# Altium PCB OBCComms.PcbDoc
Units mil, origin at the board's own origin, x right, y up, seen from the top; angles counter-clockwise.
Board outline 3625 x 3400 mil, 2 copper layers (Component Side, Bottom Layer), stack 65.756 mil thick; 25 components, 29 nets, 206 pads, 43 vias.
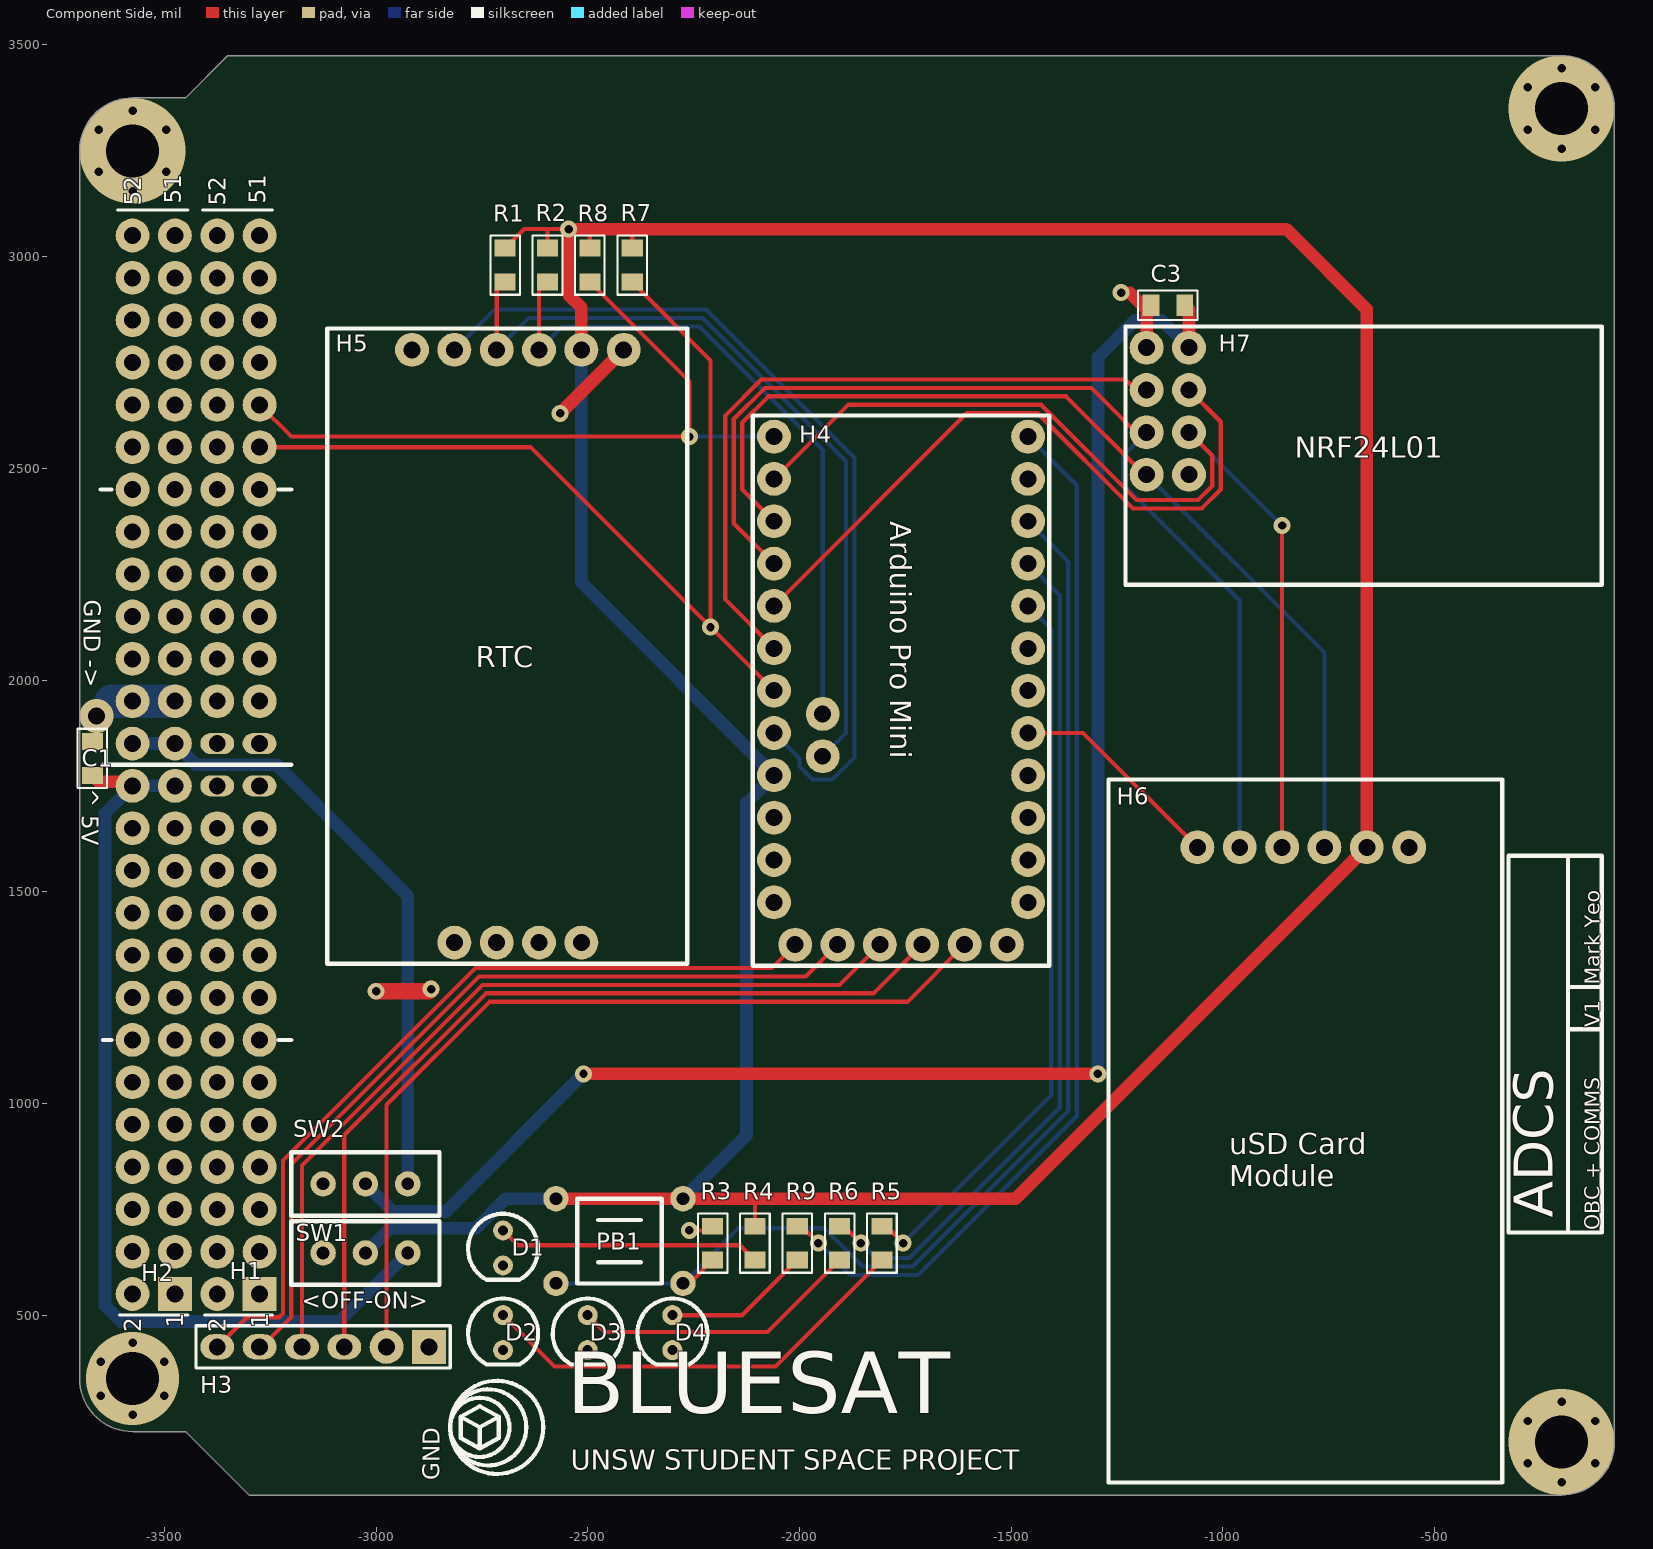
[diagram p0: Component Side view]
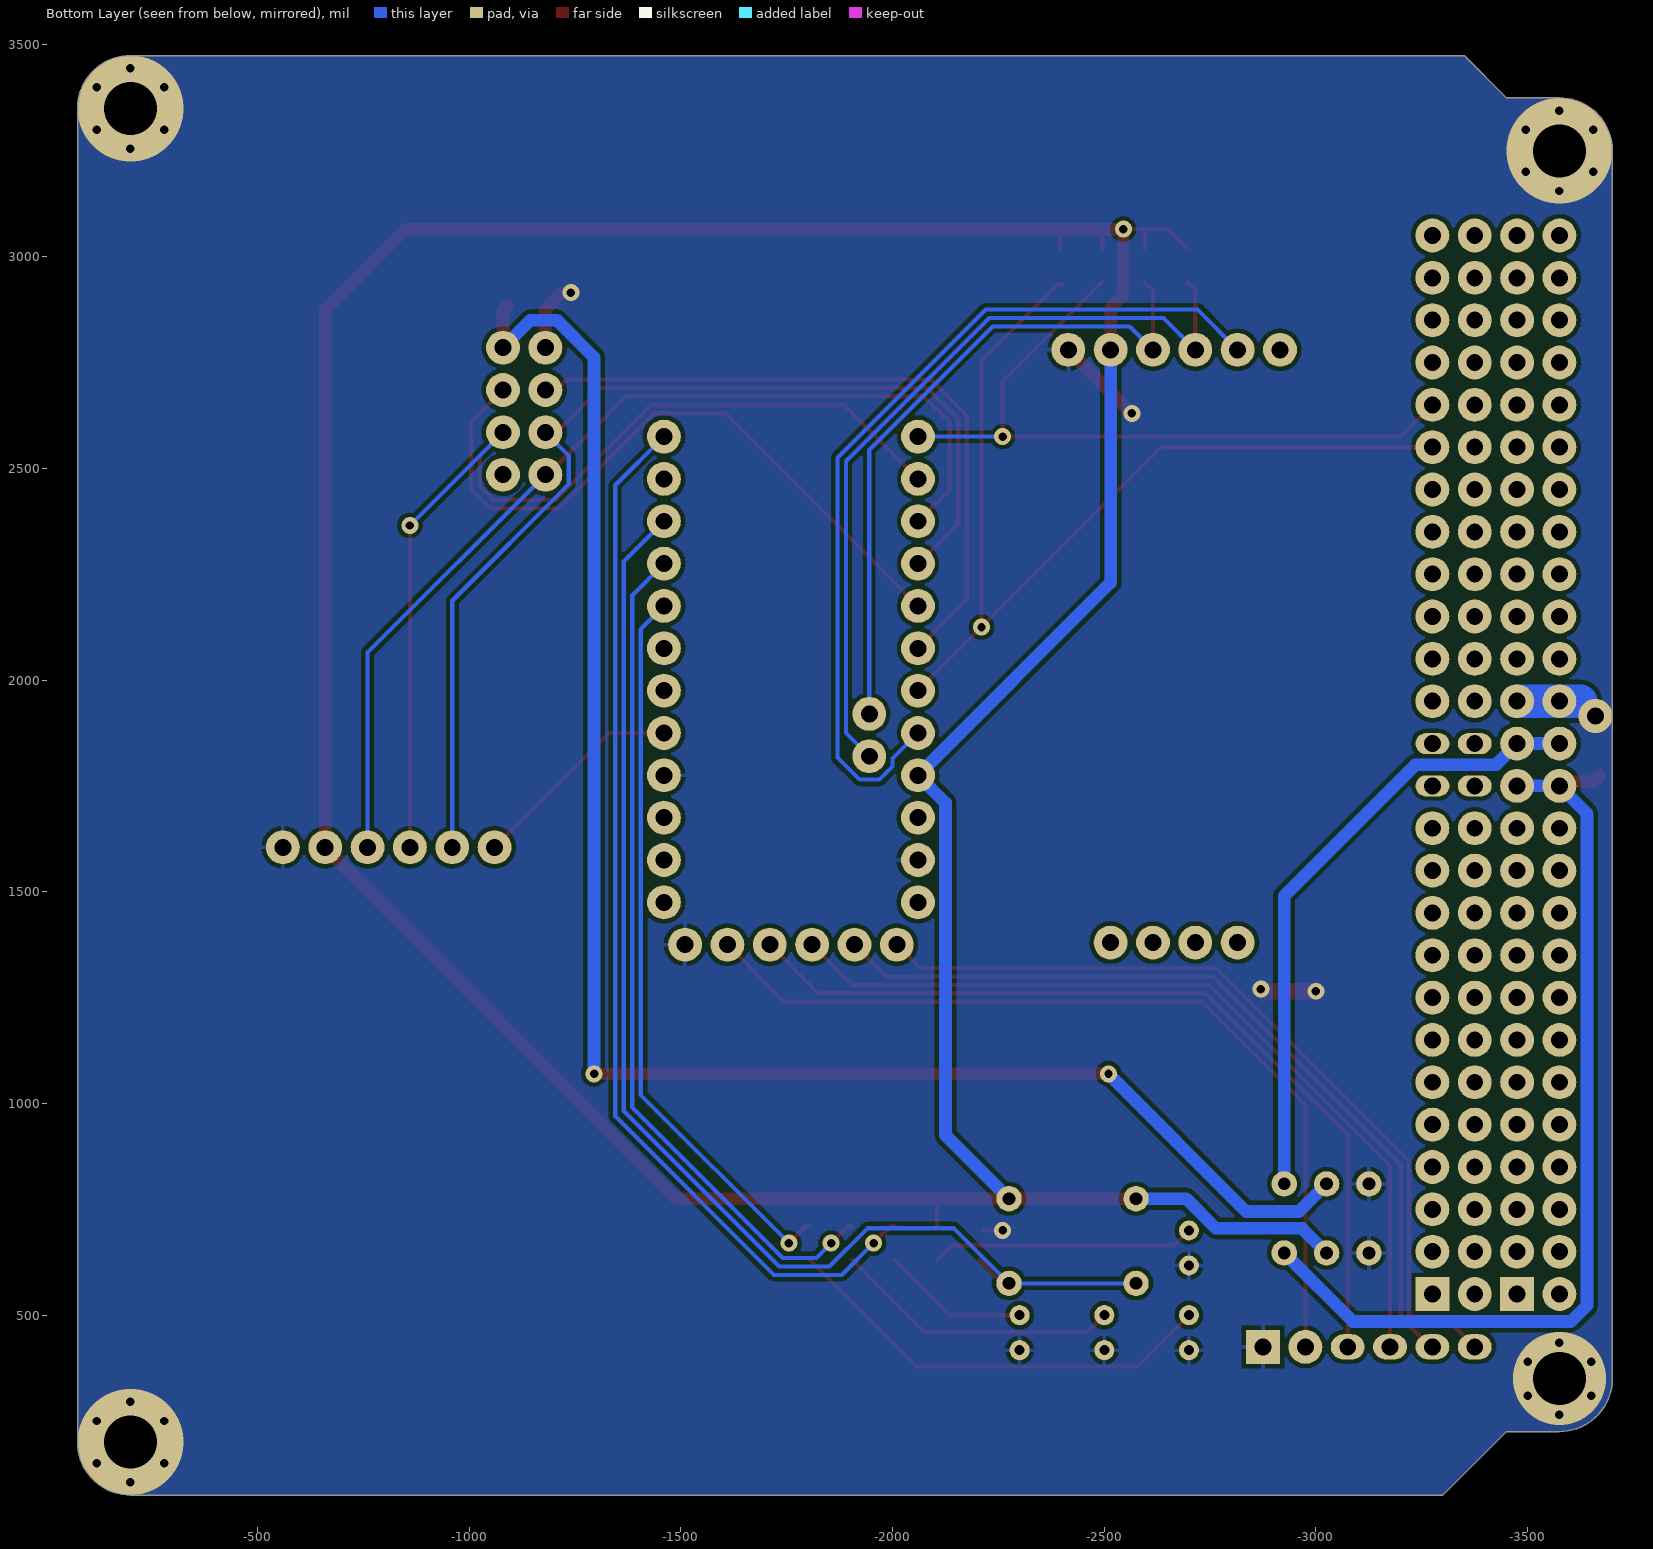
[diagram p1: Bottom Layer view, seen from below]

## Layer stack, top to bottom
Top Solder: solder mask 0.394, Solder Resist, Dk 3.5
Component Side: signal copper 1.378
Dielectric 1: core 63, FR-4, Dk 4.2
Bottom Layer: signal copper 1.378
Solder Side: solder mask 0.394, Solder Resist, Dk 3.5

## Board outline
-3575,225 cw(c-3575,350) -3700,350 -3700,3250 cw(c-3575,3250) -3575,3375 -3450,3375 -3350,3475 -200,3475 cw(c-200,3350) -75,3350 -75,200 cw(c-200,200) -200,75 -3300,75 -3450,225

## Design rules (kind name [scope] priority, off if disabled: settings)
Clearance [All] p1: gap=10
Clearance "Clearance (Same Net)" [All] p2: gap=0 except(8: SMDPad-SMDPad SMDPad-THPad SMDPad-Via)
ComponentClearance [All] p1: gap=0 collisioncheckmode=3 verticalgap=0 showdistances=FALSE
HoleSize HoleSize_1 [All] p1: absolutevalues=TRUE maxlimit=100000 minlimit=24 maxpercent=80.000 minpercent=20.000
HoleSize [All] p2: absolutevalues=TRUE maxlimit=100 minlimit=1 maxpercent=80.000 minpercent=20.000
HoleToHoleClearance mdViaViaSameLayer [All] p1: gap=8 allowstackedmicrovias=TRUE
HoleToHoleClearance [All] p2: gap=10 allowstackedmicrovias=TRUE
PasteMaskExpansion mlMinCreamFrame [All] p1: expansion=0
PasteMaskExpansion [All] p2: expansion=0
PlaneConnect PlaneConnect_1 [All] p1: planeconnectstyle=Relief reliefexpansion=20 reliefentries=4 reliefconductorwidth=10 reliefairgap=10
PlaneConnect PlaneConnect_2 [IsVia AND InNet('GND')] p2: planeconnectstyle=Direct reliefexpansion=20 reliefentries=4 reliefconductorwidth=10 reliefairgap=10
PolygonConnect ThermalVias [IsVia] p1: connectstyle=Direct reliefconductorwidth=10 reliefentries=4 polygonreliefangle="90 Angle" airgapwidth=10
PolygonConnect [All] p2: connectstyle=Relief reliefconductorwidth=10 reliefentries=4 polygonreliefangle="90 Angle" airgapwidth=10
RoutingVias [All] p1: holewidth=28 width=50 viastyle="Through Hole" minholewidth=28 minwidth=50 maxholewidth=28 maxwidth=50
SilkToSilkClearance [All] p1 off: silktosilkclearance=10
SilkToSolderMaskClearance [IsPad] p1 off: minsilkscreentomaskgap=10 clearancetoexposedcopper=TRUE
SolderMaskExpansion mlMinStopFrame [All] p1: expansion=4
SolderMaskExpansion [All] p2: expansion=4
Width Width_1 [All] p1: maxlimit=100000 minlimit=6 preferedwidth=10
Width [All] p2: maxlimit=10 minlimit=8 preferedwidth=10
23 further rules are at their usual default settings.

## Components (designator, comment, footprint, x,y, rotation, side; value= is the part's Value field where it differs from the comment)
C1 "100nF" 0805C-TBD -3670,1785 r90 top
C3 "10uF" 0805C-GENERIC -1160,2885 r0 top
D1 "LED" LED -2700,700 r0 top
D2 "LED" LED -2700,500 r0 top
D3 "LED" LED -2500,500 r0 top
D4 "LED" LED -2300,500 r0 top
H1 "26X2 Header" "26X2 Header"#1 -3275,550 r90 top
H2 "26X2 Header" "26X2 Header"#2 -3475,550 r90 top
H3 "Header 6" HDR1X6 -2875,425 r180 top
H4 "Arduino Pro Mini" "Arduino Pro Mini" -1460,1475 r180 top
H5 "DS3231" RTC -2915,2780 r90 top
H6 "uSD Card Module" "uSD Card Module" -1060,1605 r90 top
H7 "NRF24L01" NRF24L01 -1180,2785 r0 top
PB1 "PushButton" PushButton -2575,575 r0 top
R1 "4K7" 0805R-4K7 -2695,3010 r270 top
R2 "4K7" 0805R-4K7 -2595,3010 r270 top
R3 "4K7" 0805R-4K7 -2205,640 r90 top
R4 "150R" 0805R-150 -2105,700 r270 top
R5 "150R" 0805R-150 -1805,700 r270 top
R6 "150R" 0805R-150 -1905,700 r270 top
R7 "4K7" 0805R-4K7 -2395,3010 r270 top
R8 "4K7" 0805R-4K7 -2495,3010 r270 top
R9 "150R" 0805R-150 -2005,700 r270 top
SW1 "ToggleSwitch" SWITCHFOOTPRINT -2925,647 r90 top
SW2 "ToggleSwitch" SWITCHFOOTPRINT -2925,810 r90 top

## Footprints (in the part's own frame and the unit in brackets; to place one, negate y for a bottom-side part, rotate by r counter-clockwise, add the part's x,y. Pads: shape width x height; smd on the part's side, far side on the other; paste and mask are expansions set on the pad)
"26X2 Header"#1 [mil]
  rect 80x80 hole 40: 1(0,0)
  round 80 hole 40: 2(0,100) 3(100,0) 4(100,100) 5(200,0) 6(200,100) 7(300,0) 8(300,100) 9(400,0) 10(400,100) 11(500,0) 12(500,100) 13(600,0) 14(600,100) 15(700,0) 16(700,100) 17(800,0) 18(800,100) 19(900,0) 20(900,100) 21(1000,0) 22(1000,100) 23(1100,0) 24(1100,100) 29(1400,0) 30(1400,100) 31(1500,0) 32(1500,100) 33(1600,0) 34(1600,100) 35(1700,0) 36(1700,100) 37(1800,0) 38(1800,100) 39(1900,0) 40(1900,100) 41(2000,0) 42(2000,100) 43(2100,0) 44(2100,100) 45(2200,0) 46(2200,100) 47(2300,0) 48(2300,100) 49(2400,0) 50(2400,100) 51(2500,0) 52(2500,100)
  oval 50x80 hole 40: 25(1200,0) 26(1200,100) 27(1300,0) 28(1300,100)
  silkscreen extent -50,-30 2560,135, body extent -55,-47 2555,150, height 335
"26X2 Header"#2 [mil]
  rect 80x80 hole 40: 1(0,0)
  round 80 hole 40: 2(0,100) 3(100,0) 4(100,100) 5(200,0) 6(200,100) 7(300,0) 8(300,100) 9(400,0) 10(400,100) 11(500,0) 12(500,100) 13(600,0) 14(600,100) 15(700,0) 16(700,100) 17(800,0) 18(800,100) 19(900,0) 20(900,100) 21(1000,0) 22(1000,100) 23(1100,0) 24(1100,100) 25(1200,0) 26(1200,100) 27(1300,0) 28(1300,100) 29(1400,0) 30(1400,100) 31(1500,0) 32(1500,100) 33(1600,0) 34(1600,100) 35(1700,0) 36(1700,100) 37(1800,0) 38(1800,100) 39(1900,0) 40(1900,100) 41(2000,0) 42(2000,100) 43(2100,0) 44(2100,100) 45(2200,0) 46(2200,100) 47(2300,0) 48(2300,100) 49(2400,0) 50(2400,100) 51(2500,0) 52(2500,100)
  silkscreen extent -50,-30 2560,135, body extent -55,-47 2555,150, height 335
0805C-GENERIC [mil] "CAPACITOR 0805"
  rect 40x50 smd: 1(-10,0) 2(70,0)
  silkscreen extent -40,-35 100,35, body extent -11,-25 70,25, height 26
0805C-TBD [mil] "CAPACITOR 0805"
  rect 40x50 smd: 1(-10,0) 2(70,0)
  silkscreen extent -40,-35 100,35, body extent -11,-25 70,25, height 26
0805R-4K7 [mil] "RESISTOR 0805"
  rect 40x50 smd: 1(-10,0) 2(70,0)
  silkscreen extent -40,-35 100,35, body extent -11,-25 70,25, height 27
0805R-150 [mil] "RESISTOR 0805"
  rect 40x50 smd: 1(-10,0) 2(70,0)
  silkscreen extent -40,-35 100,35, body extent -11,-25 70,25, height 27
"Arduino Pro Mini" [mil]
  round 80 hole 40: 1(0,0) 2(0,-100) 3(0,-200) 4(0,-300) 5(0,-400) 6(0,-500) 7(0,-600) 8(0,-700) 9(0,-800) 10(0,-900) 11(0,-1000) 12(0,-1100) 13(600,0) 14(600,-100) 15(600,-200) 16(600,-300) 17(600,-400) 18(600,-500) 19(600,-600) 20(600,-700) 21(600,-800) 22(600,-900) 23(600,-1000) 24(600,-1100) 25(485,-345) 26(485,-445) 27(50,100) 28(150,100) 29(250,100) 30(350,100) 31(450,100) 32(550,100)
  silkscreen extent -50,-1150 650,150
HDR1X6 [mil] "Connector; Header; 6 Position"
  rect 80x80 hole 40: 1(0,0)
  round 80 hole 40: 2(100,0)
  oval 80x60 hole 40: 3(200,0) 4(300,0) 5(400,0) 6(500,0)
  silkscreen extent -50,-50 550,50
LED [mm]
  round 1.2 hole 0.6: 1(0,0) 2(0,-2.1)
  silkscreen extent -2.1,-2.96 2.1,1
NRF24L01 [mil]
  round 80 hole 40: 1(0,0) 2(0,-100) 3(0,-200) 4(0,-300) 5(100,-300) 6(100,-200) 7(100,-100) 8(100,0)
  silkscreen extent -50,-560 1075,50
PushButton [mil]
  round 60 hole 30: 5(0,0) 6(300,0) 7(0,200) 8(300,200)
  silkscreen extent 50,0 250,200, body extent 50,0 250,200, height 300
RTC [mil]
  round 80 hole 40: 1(0,0) 2(0,-100) 3(0,-200) 4(0,-300) 5(0,-400) 6(0,-500) 7(-1400,-100) 8(-1400,-200) 9(-1400,-300) 10(-1400,-400)
  silkscreen extent -1450,-650 50,200
SWITCHFOOTPRINT [mil]
  round 60 hole 30: 2(0,0) 3(0,100) 4(0,200)
  silkscreen extent -75,-75 75,275, body extent -75,-75 75,275, height 300
"uSD Card Module" [mil]
  round 80 hole 40: 1(0,0) 2(0,-100) 3(0,-200) 4(0,-300) 5(0,-400) 6(0,-500)
  silkscreen extent -1500,-720 160,210

## Part data
C1: library part 0805C-100nF-25V-X7R-MUR, "CAPACITOR 0805 CERAMIC"
C3: library part 0805C-10UF-16V-X5R-TDK, "CAPACITOR 0805 CERAMIC"
D1 D2 D3 D4: "Small LED"
H3: "Header, 6-Pin"
H5: "RTC"
H7: "Radio Transceiver"
R1 R2 R3 R7 R8: library part 0805R-4K7, "RESISTOR 0805 1/4 WATT THIN FILM"
R4 R5 R6 R9: library part 0805R-150, "RESISTOR 0805 1/4 WATT THIN FILM"

## Via types
v1: diameter 40, hole 20, Component Side to Bottom Layer, 38 vias
v2: diameter 250, hole 125, Component Side to Bottom Layer, 3 vias
v3: diameter 220, hole 125, Component Side to Bottom Layer, 1 vias
v4: diameter 80, hole 40, Component Side to Bottom Layer, 1 vias

## Nets (pads, with @x,y where several pads share a name; then routed paths per layer and width w, separated by ;. In a path a pad name is that pad's centre, name@x,y a point inside that pad or via, vN(x,y) a via of type N, cw(c..) or ccw(c..) an arc to the next point about the centre after c; other vN are vias at no path point)
3V3: C3.2 H7.8 SW2.3 | length 3966
  Component Side w30: v1(-2510,1070) v1(-1295,1070) ; C3.2 -1080,2875 H7.8
  Bottom Layer w30: SW2.3 -2960,745 -2835,745 v1(-2510,1070) ; v1(-1295,1070) -1295,2761.92 -1206.92,2850 -1145,2850 H7.8
3V3_IN: H2.27 H2.28 SW2.2 | length 1479.1
  Bottom Layer w30: H2.28 H2.27 -3425,1800 -3235,1800 -2925,1490 SW2.2
5V_IN: C1.1 H2.25 H2.26 SW1.2 | length 2242.9
  Component Side w30: C1.1 -3655,1760 H2.26@-3585,1760
  Bottom Layer w30: H2.25 H2.26 -3640,1685 -3640,523.08 -3601.92,485 -3087,485 SW1.2
CE_NRF: H4.19 H7.2 | length 1620.3
  Component Side w10: H4.19 -2175,2190 -2175,2625 -2090,2710 -1230,2710 H7.2@-1200,2680
CS_NRF: H4.20 H7.7 | length 1621.4
  Component Side w10: H4.20 -1605,2630 -1437.22,2630 -1212.22,2405 -1050,2405 -1005,2450 -1005,2610 H7.7
CSUSD: H4.5 H6.1 | length 511.8
  Component Side w10: H4.5 -1330,1875 H6.1
EXTCLK: H4.17 H5.2 | length 2124.4
  Bottom Layer w10: H5.2 -2720,2875 -2220,2875 -1870,2525 -1870,1817.22 -1922.22,1765 -1969,1765 -2000,1796 -2000,1815 H4.17 H4.17@-2060,1856
GND: C1.2 C3.1 D1.2 D2.2 D3.2 D4.2 H2.29 H2.30 H3.1 H4.4 H4.14 H4.27 H5.6 H6.6 H7.1 R3.2 SW1.4 SW2.4 | length 705.8
  Component Side w10: v1(-2260,700) R3.2@-2215,700
  Component Side w30: v1(-2565,2630) H5.6 ; v1(-1240,2915) -1220,2915 -1180,2875 H7.1
  Component Side w40: v1(-3000,1265) -2875,1265 v1(-2870,1270)
  Bottom Layer w80: -3625,1950 H2.30 H2.29
  other v1: -200,105 -280,150 -120,150 -280,250 -120,250 -3575,265 -200,295 -3650,310 -3500,310 -3650,390 -3500,390 -3575,435 -3575,3155 -3655,3200 -3495,3200 -200,3255 -3655,3300 -3495,3300 -280,3300 -120,3300 -3575,3345 -280,3400 -120,3400 -200,3445
  other v2: -200,200 -3575,3250 -200,3350
  other v3: -3575,350
  other v4: -3660,1915
LED_B: H4.12 R9.1 | length 2515.6
  Component Side w10: R9.1 -1995,710 v1(-1955,670)
  Bottom Layer w10: v1(-1955,670) -1880,595 -1720,595 -1345,970 -1345,2460 H4.12
LED_G: H4.9 R6.1 | length 2013.9
  Component Side w10: R6.1 -1895,710 v1(-1855,670)
  Bottom Layer w10: v1(-1855,670) -1820,635 -1740.5,635 -1385,990.5 -1385,2200 H4.9
LED_Y: H4.8 R5.1 | length 1739.3
  Component Side w10: R5.1 -1795,710 v1(-1755,670)
  Bottom Layer w10: v1(-1755,670) -1405,1020 -1405,2120 H4.8
MISO: H4.22 H6.4 H7.4 | length 2375.6
  Component Side w10: H4.22 -2135,2450 -2135,2608.43 -2073.43,2670 -1370,2670 -1185,2485 H7.4
  Bottom Layer w10: H7.4 -760,2065 H6.4
MOSI: H4.23 H6.3 H7.6 | length 2435.1
  Component Side w10: H4.23 -1885,2650 -1428.93,2650 -1203.93,2425 -1058.28,2425 -1025,2458.28 -1025,2530 H7.6 ; H6.3 v1(-860,2365)
  Bottom Layer w10: H7.6 v1(-860,2365)
NetD1_1: D1.1 R4.2 | length 624
  Component Side w10: D1.1 -2665,665 -2140,665 R4.2
NetD2_1: D2.1 R5.2 | length 1049.3
  Component Side w10: D2.1 -2578.7,378.7 -2056.3,378.7 R5.2
NetD3_1: D3.1 R6.2 | length 682
  Component Side w10: D3.1 -2460,460 -2075,460 R6.2
NetD4_1: D4.1 R9.2 | length 348.8
  Component Side w10: D4.1 -2135,500 R9.2
NetH3_2: H3.2 H4.28 | length 2093.5
  Component Side w10: H3.2 -2975,996.86 -2731.86,1240 -1745,1240 H4.28
NetH3_3: H3.3 H4.29 | length 2051.5
  Component Side w10: H3.3 -3075,925.15 -2740.15,1260 -1825,1260 H4.29
NetH3_4: H3.4 H4.30 | length 2009.5
  Component Side w10: H3.4 -3175,853.43 -2748.43,1280 -1905,1280 H4.30
NetH3_5: H3.5 H4.31 | length 1970.1
  Component Side w10: H3.5 -3270.5,425 -3200,495.5 -3200,856.72 -2756.72,1300 -1985,1300 H4.31
NetH3_6: H3.6 H4.32 | length 1970.1
  Component Side w10: H3.6 -3305,495 -3228.79,495 -3220,503.79 -3220,865 -2765,1320 -2065,1320 H4.32
PUSH_BUTTON: H4.10 PB1.5 PB1.6 R3.1 | length 2978.1
  Component Side w10: PB1.6 -2260,575 R3.1
  Bottom Layer w10: PB1.5 PB1.6 -2145,705 -1940.5,705 -1850.5,615 -1732.22,615 -1365,982.22 -1365,2280 H4.10
SCK: H4.21 H6.2 H7.3 | length 2528.7
  Component Side w10: H4.21 -2155,2370 -2155,2616.72 -2081.72,2690 -1310,2690 H7.3@-1200,2580
  Bottom Layer w10: H7.3 -1235,2530 -1235,2462.22 -960,2187.22 H6.2
SCL: H4.25 H5.3 R1.2 | length 1884
  Component Side w10: H5.3 -2715,2920 R1.2
  Bottom Layer w10: H5.3 -2640,2855 -2228.28,2855 -1890,2516.72 -1890,1875 H4.25
SCL_EXT: H1.43 H4.24 R8.2 | length 1708.4
  Component Side w10: H1.43 -3200,2575 v1(-2260,2575) -2260,2705 R8.2
  Bottom Layer w10: v1(-2260,2575) H4.24
SDA: H4.26 H5.4 R2.2 | length 1605.3
  Component Side w10: H5.4 -2615,2920 R2.2
  Bottom Layer w10: H5.4 -2560,2835 -2236.57,2835 -1945,2543.43 H4.26
SDA_EXT: H1.41 H4.18 R7.2 | length 2347.7
  Component Side w10: H1.41 -2635,2550 v1(-2210,2125) ; R7.2@-2400,2935 -2390,2935 -2210,2755 v1(-2210,2125) ; H4.18 v1(-2210,2125)
VCC: H4.16 H5.5 H6.5 PB1.7 PB1.8 R1.1 R2.1 R4.1 R7.1 R8.1 SW1.3 | length 8944.1
  Component Side w10: R1.1 -2650,3065 -2595,3065 ; R2.1 -2595,3065 ; v1(-2545,3065) -2595,3065 ; R8.1 -2495,3065 ; R7.1 -2395,3065 ; R4.1 -2105,775
  Component Side w30: PB1.7 PB1.8 -2105,775 -1490,775 H6.5 -660,2875 -850,3065 -2395,3065 -2495,3065 v1(-2545,3065) -2545,2909.64 -2515,2879.64 H5.5
  Bottom Layer w30: SW1.3 -2967,705 -2763.76,705 -2693.76,775 PB1.7 ; H5.5 -2515,2230 H4.16 -2125,1710 -2125,925 PB1.8
pads on no net: H1.1 H1.2 H1.3 H1.4 H1.5 H1.6 H1.7 H1.8 H1.9 H1.10 H1.11 H1.12 H1.13 H1.14 H1.15 H1.16 H1.17 H1.18 H1.19 H1.20 H1.21 H1.22 H1.23 H1.24 H1.25 H1.26 H1.27 H1.28 H1.29 H1.30 H1.31 H1.32 H1.33 H1.34 H1.35 H1.36 H1.37 H1.38 H1.39 H1.40 H1.42 H1.44 H1.45 H1.46 H1.47 H1.48 H1.49 H1.50 H1.51 H1.52 H2.1 H2.2 H2.3 H2.4 H2.5 H2.6 H2.7 H2.8 H2.9 H2.10 H2.11 H2.12 H2.13 H2.14 H2.15 H2.16 H2.17 H2.18 H2.19 H2.20 H2.21 H2.22 H2.23 H2.24 H2.31 H2.32 H2.33 H2.34 H2.35 H2.36 H2.37 H2.38 H2.39 H2.40 H2.41 H2.42 H2.43 H2.44 H2.45 H2.46 H2.47 H2.48 H2.49 H2.50 H2.51 H2.52 H4.1 H4.2 H4.3 H4.6 H4.7 H4.11 H4.13 H4.15 H5.1 H5.7 H5.8 H5.9 H5.10 H7.5

## Polygon pours and split planes (outlines as drawn)
GND on Bottom Layer "Bottom Layer-GND" (solid, pour order 7): -3575,225 cw(c-3575,350) -3700,350 -3700,3250 cw(c-3575,3250) -3575,3375 -3450,3375 -3350,3475 -200,3475 cw(c-200,3350) -75,3350 -75,200 cw(c-200,200) -200,75 -3300,75 -3450,225

## Silkscreen, mask and mechanical layers (free items; w line width, h text height)
Top Overlay:
  circle w10: c-2715,235 r110
  circle w10: c-2735,235 r90
  circle w10: c-2755,235 r70
  lines w10: -3650,2450 -3625,2450 ; -3645,1150 -3625,1150 ; -3645,1800 -3200,1800 ; -3230,1150 -3200,1150 ; -3230,2450 -3200,2450 ; -185,695 -185,1585 ; -185,1175 -105,1175 ; -185,1275 -105,1275 ; -2800,260 -2755,285 -2710,260 ; -2800,260 -2800,210 -2755,185 ; -2800,260 -2755,235 ; -2755,185 -2710,210 -2710,260 ; -2755,185 -2755,235 ; -2755,235 -2710,260 ; -325,695 -325,1585 -105,1585 -105,695 -325,695
  text "GND ->" at -3690,2190 h40 r270
  text "^ 5V" at -3695,1745 h40 r270
  text "Mark Yeo" at -110,1280 h35 r90
  text "V1" at -110,1180 h35 r90
  text "ADCS" at -190,730 h157.48 r90
  text "OBC + COMMS" at -110,700 h35 r90
  text "<OFF-ON>" at -3175,515 h40
  text "BLUESAT" at -2550,220 h250
  text "UNSW STUDENT SPACE PROJECT" at -2540,135 h47.24
  text "GND" at -2850,110 h40 r90
Mechanical 13:
  lines w10: -3700,350 ccw(c-3575,350) -3575,225 -3500,225 -3450,225 -3300,75 -200,75 ccw(c-200,200) -75,200 -75,3350 ccw(c-200,3350) -200,3475 -3350,3475 -3450,3375 -3500,3375 -3575,3375 ccw(c-3575,3250) -3700,3250 -3700,350

## Text inside footprints (layer, text, board x,y; h text height)
H1: Top Overlay "2" at -3355,460.16 h40 r90; Top Overlay "1" at -3255,470.16 h40 r90; Top Overlay "51" at -3260,3125.16 h40 r90; Top Overlay "52" at -3355,3120.16 h40 r90
H2: Top Overlay "2" at -3555,460.16 h40 r90; Top Overlay "1" at -3455,470.16 h40 r90; Top Overlay "51" at -3460,3125.16 h40 r90; Top Overlay "52" at -3555,3120.16 h40 r90
H5: Top Overlay "RTC" at -2765,2030 h50
H6: Top Overlay "uSD Card / Module" at -985,805 h50